# Altium PCB PCB1.PcbDoc (part 1 of 2)
Units mm, origin at the board's own origin, x right, y up, seen from the top; angles counter-clockwise.
Board outline 223.25 x 140.7 mm, 2 copper layers (Top Layer, Bottom Layer); 96 components, 172 nets, 687 pads, 133 vias.
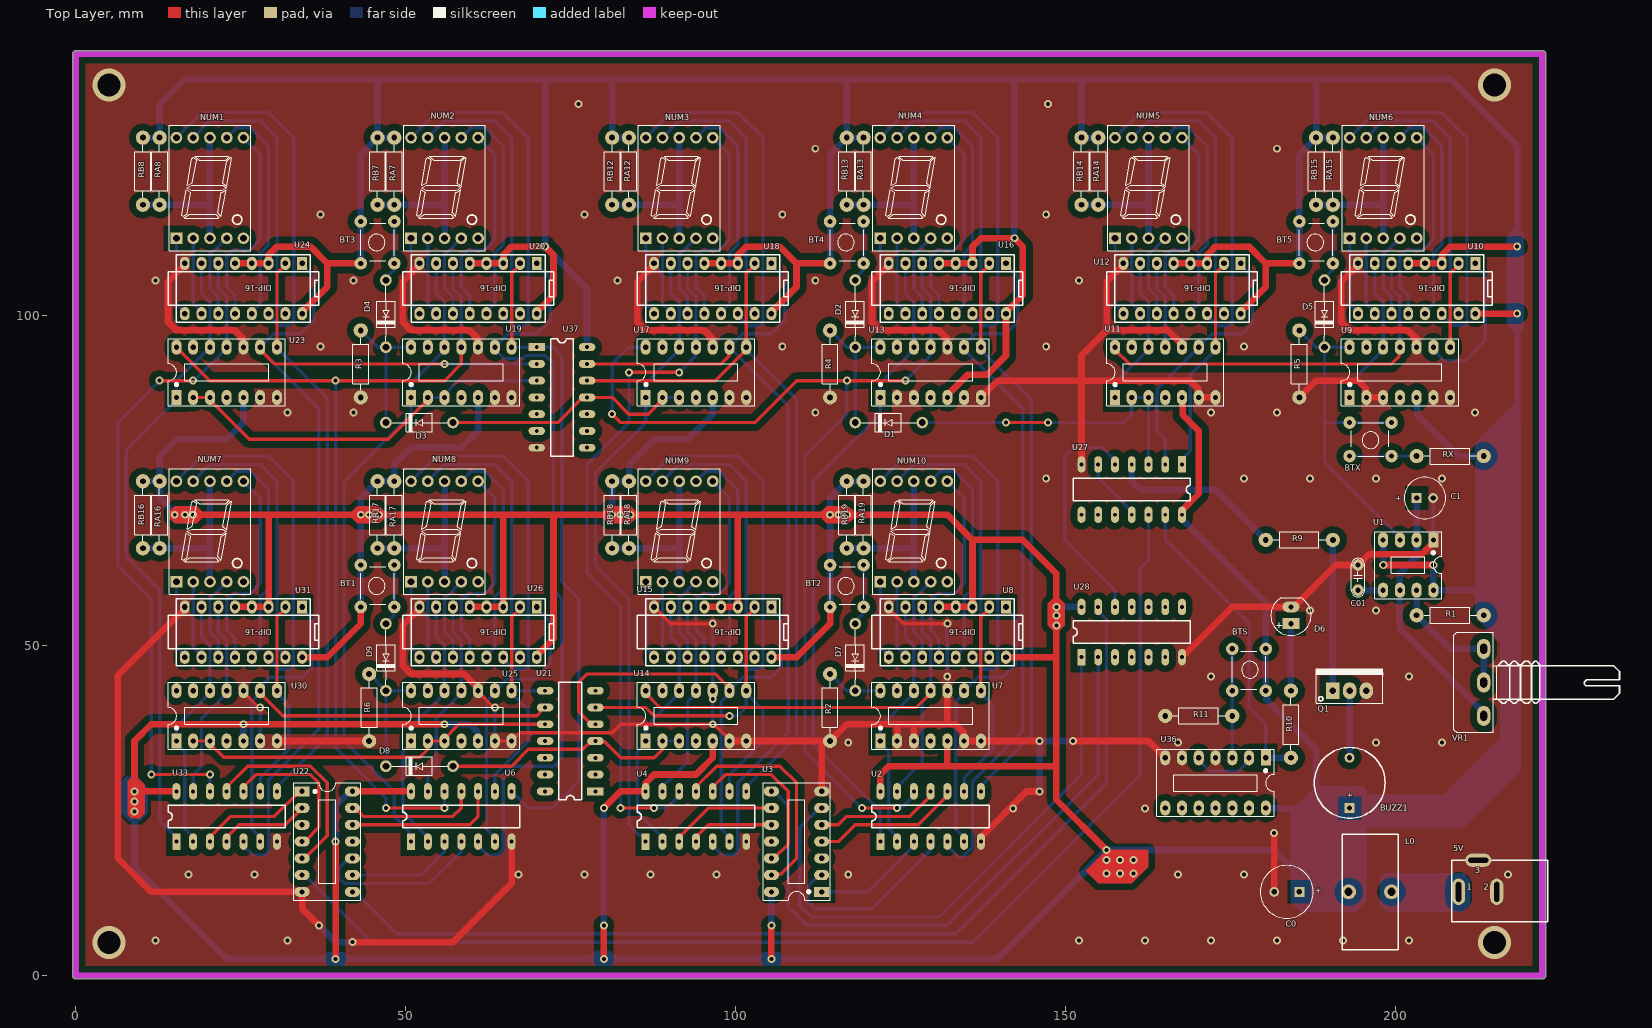
[diagram p0: Top Layer view]
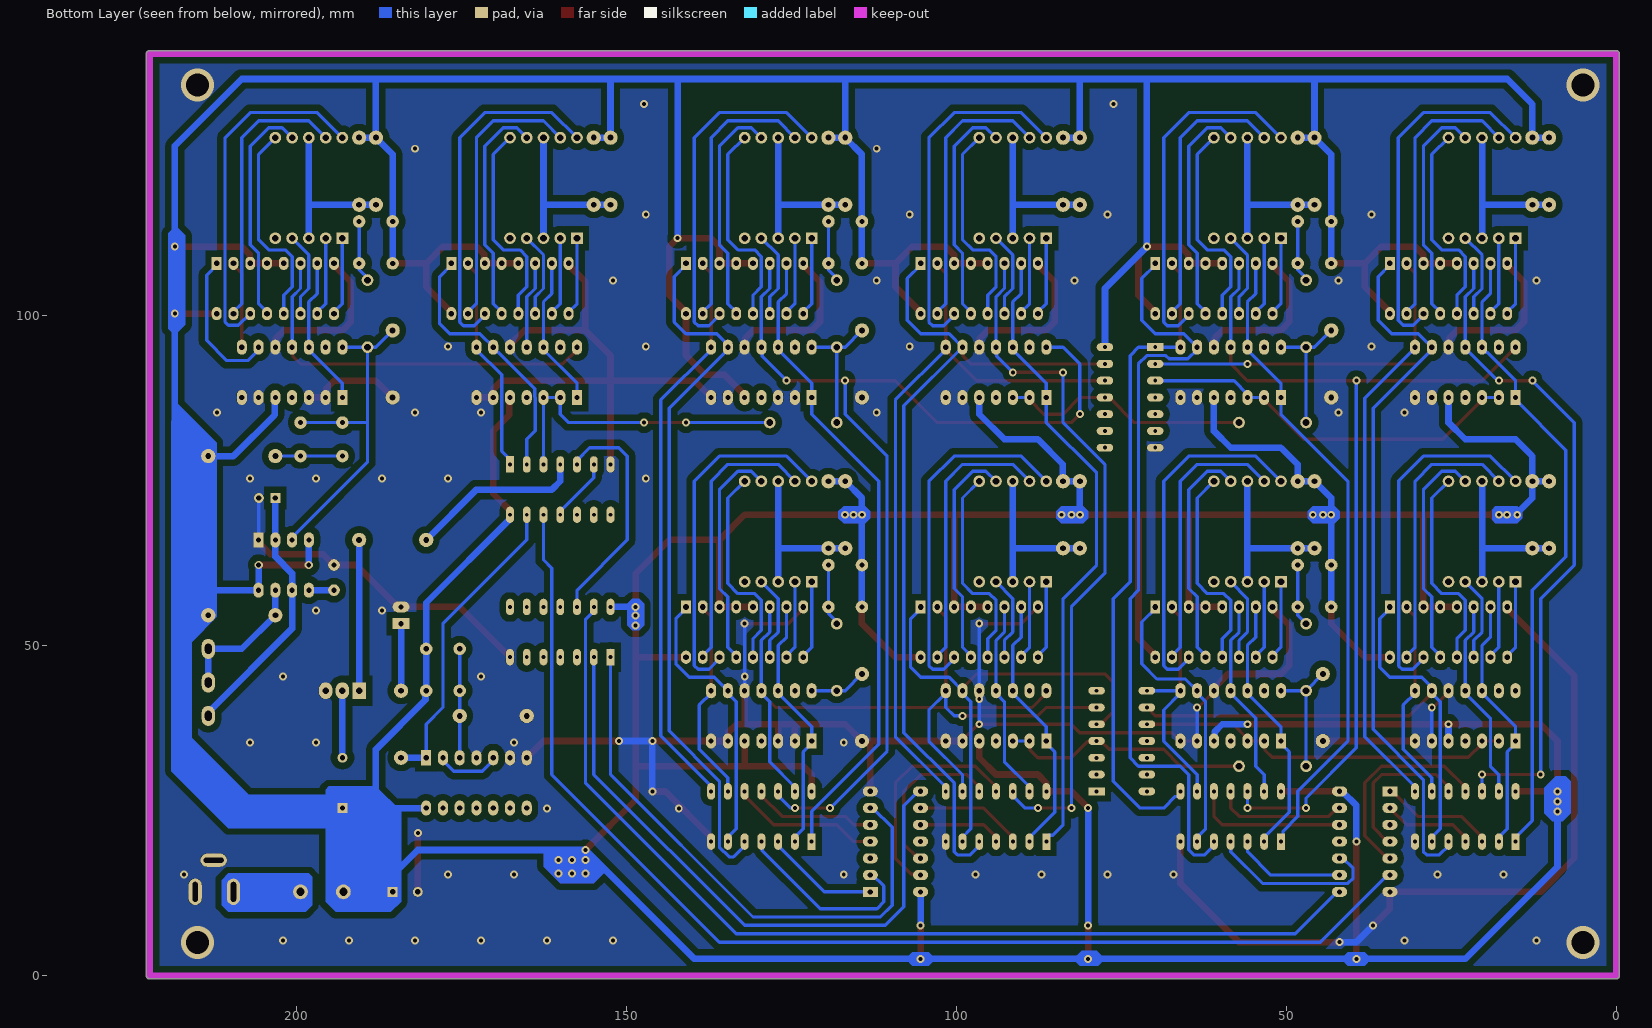
[diagram p1: Bottom Layer view, seen from below]
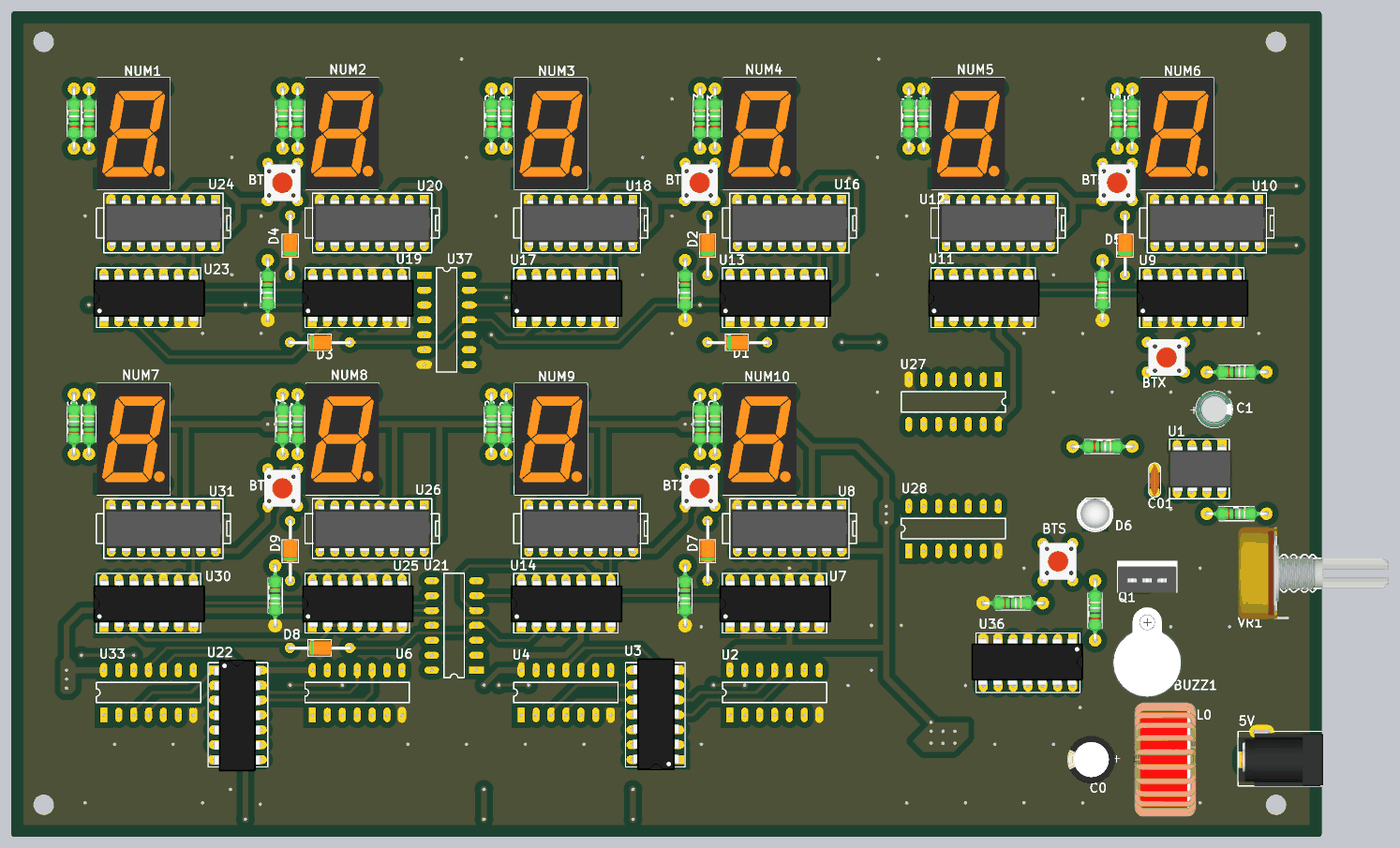
[diagram p3: 3D render of the assembled board from above, using the file's embedded part models]

## Layer stack, top to bottom
Top Solder: solder mask 0.0102, Solder Resist, Dk 3.5
Top Layer: signal copper 0.0356
Dielectric 1: dielectric 0.32, FR-4, Dk 4.8
Bottom Layer: signal copper 0.0356
Bottom Solder: solder mask 0.0102, Solder Resist, Dk 3.5

## Board outline
-0.5,0 -0.5,139.7 cw(c0,139.7) 0,140.2 222.25,140.2 cw(c222.25,139.7) 222.75,139.7 222.75,0 cw(c222.25,0) 222.25,-0.5 0,-0.5 cw(c0,0)

## Design rules (kind name [scope] priority, off if disabled: settings)
Clearance [All] p1: gap=0.2 ignorepadtopadclearanceinfootprint=FALSE except(1: Arc-Poly Arc-Region Track-Poly Track-Region SMDPad-Poly SMDPad-Region THPad-Poly THPad-Region Via-Poly Via-Region Fill-Poly Fill-Region Poly-Poly Poly-Region Region-Region)
HoleSize [All] p1: absolutevalues=TRUE maxlimit=6 minlimit=0.4 maxpercent=80.000 minpercent=20.000
MinimumSolderMaskSliver [All] p1: minsoldermaskwidth=0.1
PolygonConnect [All] p1: thpad.connectstyle=Relief thpad.reliefconductorwidth=0.5 thpad.reliefentries=4 thpad.polygonreliefangle="90 Angle" thpad.airgapwidth=0 smdpad.connectstyle=Relief smdpad.reliefconductorwidth=0.5 smdpad.reliefentries=4 smdpad.polygonreliefangle="90 Angle" smdpad.airgapwidth=0.5 via.connectstyle=Direct via.reliefconductorwidth=0.254 via.reliefentries=4 via.polygonreliefangle="90 Angle" via.airgapwidth=0.254
RoutingVias [All] p1: holewidth=0.6 width=1.2 viastyle="Through Hole" minholewidth=0.4 minwidth=0.8 maxholewidth=2 maxwidth=5
SilkToSolderMaskClearance [IsPad] p1: minsilkscreentomaskgap=0.03 clearancetoexposedcopper=TRUE
SolderMaskExpansion [All] p1: expansion=0.102 istentingtop=FALSE
Width [All] p1: maxlimit=1 minlimit=0.2 preferedwidth=0.5
27 further rules are at their usual default settings.

## Components (designator, comment, footprint, x,y, rotation, side; value= is the part's Value field where it differs from the comment)
5V "Jac DC" DC5 212.45,12.7 r180 top
BT1 "SW" SW2-DIP 43.18,55.88 r90 top value="Button chip 4 pin"
BT2 "SW" SW2-DIP 114.3,55.88 r90 top value="Button chip 4 pin"
BT3 "SW" SW2-DIP 43.18,107.95 r90 top value="Button chip 4 pin"
BT4 "SW" SW2-DIP 114.3,107.95 r90 top value="Button chip 4 pin"
BT5 "SW" SW2-DIP 185.42,107.95 r90 top value="Button chip 4 pin"
BTS "SW" SW2-DIP 180.34,49.53 r270 top value="Button chip 4 pin"
BTX "SW" SW2-DIP 199.39,78.74 r180 top value="Button chip 4 pin"
BUZZ1 "Speaker" SPEAKER 193.04,25.4 r90 top
C0 "100uF" CA-ALU-8 183.515,12.7 r180 top value=104
C1 "10uF" CA-ALU-6.3 204.45,72.39 r0 top value=104
C01 "104" CN1.5 194.31,60.452 r270 top value=33pF
D1 "Diode" DIO-1A 128.27,83.82 r180 top value=1N5007
D2 "Diode" DIO-1A 118.11,105.41 r270 top value=1N5007
D3 "Diode" DIO-1A 57.15,83.82 r180 top value=1N5007
D4 "Diode" DIO-1A 46.99,105.41 r270 top value=1N5007
D5 "Diode" DIO-1A 189.23,105.41 r270 top value=1N5007
D6 "LED" LED-5-RED 184.15,53.34 r90 top value="LED 3 ly Single Colour"
D7 "Diode" DIO-1A 118.11,53.34 r270 top value=1N5007
D8 "Diode" DIO-1A 57.15,31.75 r180 top value=1N5007
D9 "Diode" DIO-1A 46.99,53.34 r270 top value=1N5007
L0 "L-DIP-1" L-DIP-M-17.5x8.5 196.14,12.7 r180 top value="150 mH"
NUM1 "7SEG" LED7SEG-1-0.56 20.193,118.745 r0 top
NUM2 "7SEG" LED7SEG-1-0.56 55.753,118.745 r0 top
NUM3 "7SEG" LED7SEG-1-0.56 91.313,118.745 r0 top
NUM4 "7SEG" LED7SEG-1-0.56 126.873,118.745 r0 top
NUM5 "7SEG" LED7SEG-1-0.56 162.433,118.745 r0 top
NUM6 "7SEG" LED7SEG-1-0.56 197.993,118.745 r0 top
NUM7 "7SEG" LED7SEG-1-0.56 20.193,66.675 r0 top
NUM8 "7SEG" LED7SEG-1-0.56 55.753,66.675 r0 top
NUM9 "7SEG" LED7SEG-1-0.56 91.313,66.675 r0 top
NUM10 "7SEG" LED7SEG-1-0.56 126.873,66.675 r0 top
Q1 "TIP41C" TO220-123 190.5,43.18 r0 top
R1 "1K" RES-1/4W 207.899,54.737 r180 top
R2 "1K" RES-1/4W 114.427,41.021 r90 top
R3 "1K" RES-1/4W 43.307,93.091 r90 top
R4 "1K" RES-1/4W 114.427,93.091 r90 top
R5 "1K" RES-1/4W 185.547,93.091 r90 top
R6 "1K" RES-1/4W 44.577,41.021 r90 top
R9 "220" RES-1/4W 185.039,66.167 r180 top
R10 "220" RES-1/4W 184.023,37.719 r270 top
R11 "10K" RES-1/4W 169.799,39.497 r180 top
RA7 "470" RES-1/4W 48.133,121.539 r270 top
RA8 "470" RES-1/4W 12.573,121.539 r270 top
RA12 "470" RES-1/4W 83.693,121.539 r270 top
RA13 "470" RES-1/4W 119.253,121.539 r270 top
RA14 "470" RES-1/4W 154.813,121.539 r270 top
RA15 "470" RES-1/4W 190.373,121.539 r270 top
RA16 "470" RES-1/4W 12.573,69.469 r270 top
RA17 "470" RES-1/4W 48.133,69.469 r270 top
RA18 "470" RES-1/4W 83.693,69.469 r270 top
RA19 "470" RES-1/4W 119.253,69.469 r270 top
RB7 "470" RES-1/4W 45.593,121.539 r270 top
RB8 "470" RES-1/4W 10.033,121.539 r270 top
RB12 "470" RES-1/4W 81.153,121.539 r270 top
RB13 "470" RES-1/4W 116.713,121.539 r270 top
RB14 "470" RES-1/4W 152.273,121.539 r270 top
RB15 "470" RES-1/4W 187.833,121.539 r270 top
RB16 "470" RES-1/4W 10.033,69.469 r270 top
RB17 "470" RES-1/4W 45.593,69.469 r270 top
RB18 "470" RES-1/4W 81.153,69.469 r270 top
RB19 "470" RES-1/4W 116.713,69.469 r270 top
RX "1K" RES-1/4W 207.899,78.867 r180 top
U1 "NE555" DIP8 202.057,62.23 r180 top
U2 "4077" DIP14#1 121.92,20.32 r90 top
U3 "7421" DIP14#2 113.03,12.7 r90 top
U4 "4077" DIP14#1 86.36,20.32 r90 top
U6 "4077" DIP14#1 50.8,20.32 r90 top
U7 "7490" DIP14#2 121.92,35.56 r0 top
U8 "74LS247" DIP16 132.073,52.068 r180 top value=74LS238
U9 "7490" DIP14#2 193.04,87.63 r0 top
U10 "74LS247" DIP16 203.193,104.138 r180 top value=74LS238
U11 "7490" DIP14#2 157.48,87.63 r0 top
U12 "74LS247" DIP16 167.633,104.138 r180 top value=74LS238
U13 "7490" DIP14#2 121.92,87.63 r0 top
U14 "7490" DIP14#2 86.36,35.56 r0 top
U15 "74LS247" DIP16 96.513,52.068 r180 top value=74LS238
U16 "74LS247" DIP16 132.073,104.138 r180 top value=74LS238
U17 "7490" DIP14#2 86.36,87.63 r0 top
U18 "74LS247" DIP16 96.513,104.138 r180 top value=74LS238
U19 "7490" DIP14#2 50.8,87.63 r0 top
U20 "74LS247" DIP16 60.953,104.138 r180 top value=74LS238
U21 "4081" DIP14#1 78.74,27.94 r180 top
U22 "7421" DIP14#2 34.29,27.94 r270 top
U23 "7490" DIP14#2 15.24,87.63 r0 top
U24 "74LS247" DIP16 25.393,104.138 r180 top value=74LS238
U25 "7490" DIP14#2 50.8,35.56 r0 top
U26 "74LS247" DIP16 60.953,52.068 r180 top value=74LS238
U27 "4081" DIP14#1 167.64,77.47 r270 top
U28 "7411" DIP14#1 152.4,48.26 r90 top
U30 "7490" DIP14#2 15.24,35.56 r0 top
U31 "74LS247" DIP16 25.393,52.068 r180 top value=74LS238
U33 "4077" DIP14#1 15.24,20.32 r90 top
U36 "4013" DIP14#2 180.34,33.02 r180 top
U37 "4081" DIP14#1 69.85,95.25 r0 top
VR1 "50K" VR-S1 213.36,44.45 r90 top value="Volume 50k"

## Footprints (in the part's own frame and the unit in brackets; to place one, negate y for a bottom-side part, rotate by r counter-clockwise, add the part's x,y. Pads: shape width x height; smd on the part's side, far side on the other; paste and mask are expansions set on the pad)
CA-ALU-6.3 [mm] "Polarized capacitors, Aluminum Electrolytic Capacitors, 2-Leads, Body 6.3x15x2.5x0.5"
  rect 1.5x1.5 hole 0.8: 1(-1.25,0)
  round 1.5 hole 0.8: 2(1.25,0)
  silkscreen extent -3.15,-3.15 3.15,3.15, body extent -3.12,-3.15 3.17,3.15, height 11
CA-ALU-8 [mm] "Polarized capacitors, Aluminum Electrolytic Capacitors, 2-Leads, Body 8x16x3.5x0.5"
  rect 1.5x1.5 hole 0.8: 1(-1.905,0)
  round 1.5 hole 0.8: 2(1.905,0)
  silkscreen extent -4,-4 4,4, body extent -4.1,-4.1 4.1,4.1, height 14.4
CN1.5 [mil]
  round 70 hole 31: 1(-70,0) 2(80,0)
  silkscreen extent -110,-40 120,40, body extent -110,-33 120,33, height 235
DC5 [mm] "WR-DC_DC Power Jack_Right Angled_THT Center Pin ?2.0_Plug ID ?2.05_Plug OD ?5.5"
  oval 2x4 hole 0.8 slot 3 at 90 deg: 1(2.9,0) 2(-2.9,0)
  oval 4x2 hole 0.8 slot 3 at 0 deg: 3(-0.1,-4.8)
  silkscreen extent -10.6,-4.8 3.9,4.5, body extent -10.6,-4.9 3.9,4.5, height 10.7
DIO-1A [mil]
  round 70 hole 40: 1(0,0) 2(400,0)
  silkscreen extent 35,-55 365,55, body extent -11,-50 411,54, height 102
DIP8 [mil] "DIP, 8-Leads, Row Spacing 7.62mm, Pitch 2.54mm, Body 9.91x6.73mm"
  rect 60x90 hole 31: 1(-145,-150)
  oval 60x90 hole 31: 2(-45,-150) 3(55,-150) 4(155,-150) 5(155,150) 6(55,150) 7(-45,150) 8(-145,150)
  silkscreen extent -195,-200 205,200, body extent -213,-153 213,153, height 177
DIP14#1 [mm]
  rect 2.5x1.2 hole 0.6: 1(0,0)
  oval 2.5x1.2 hole 0.6: 2(0,-2.54) 3(0,-5.08) 4(0,-7.62) 5(0,-10.16) 6(0,-12.7) 7(0,-15.24) 8(7.62,-15.24) 9(7.62,-12.7) 10(7.62,-10.16) 11(7.62,-7.62) 12(7.62,-5.08) 13(7.62,-2.54) 14(7.62,0)
  silkscreen extent 2.08,-16.51 5.54,1.27, body extent 0.76,-16.51 6.86,1.27, height 2
DIP14#2 [mm] "DIP, 14-Leads, Row Spacing 7.62mm, Pitch 2.54mm, Body 19.2x6.6mm"
  rect 1.524x2.286 hole 0.787: 1(0,0)
  oval 1.524x2.286 hole 0.787: 2(2.54,0) 3(5.08,0) 4(7.62,0) 5(10.16,0) 6(12.7,0) 7(15.24,0) 8(15.24,7.62) 9(12.7,7.62) 10(10.16,7.62) 11(7.62,7.62) 12(5.08,7.62) 13(2.54,7.62) 14(0,7.62)
  silkscreen extent -1.28,-1.27 16.51,8.89, body extent -1.78,-0.32 17.27,7.68, height 3.7
DIP16 [mm]
  rect 1.5x2 hole 0.864: 1(-8.897,-3.812)
  oval 1.5x2 hole 0.864: 2(-6.357,-3.812) 3(-3.817,-3.812) 4(-1.277,-3.812) 5(1.263,-3.812) 6(3.803,-3.812) 7(6.343,-3.812) 8(8.883,-3.812) 9(8.883,3.808) 10(6.343,3.808) 11(3.803,3.808) 12(1.263,3.808) 13(-1.277,3.808) 14(-3.817,3.808) 15(-6.357,3.808) 16(-8.897,3.808)
  silkscreen extent -11.44,-5.08 11.42,5.08, body extent -10,-3.93 10,3.94, height 1.99
L-DIP-M-17.5x8.5 [mm] "Body 17.5x8.5mm, 2 leads"
  round 2.25 hole 1.25: 1(-3.25,0) 2(3.25,0)
  silkscreen extent -4.25,-8.75 4.25,8.75, body extent -5.27,-9.75 5.27,9.75, height 19.18
LED7SEG-1-0.56 [mil]
  rect 70x70 hole 40: 1(-195,-275)
  round 70 hole 40: 2(-95,-275) 3(5,-275) 4(105,-275) 5(205,-275) 6(205,325) 7(105,325) 8(5,325) 9(-95,325) 10(-195,325)
  silkscreen extent -239,-350 249,400, body extent -241,-349 251,399, height 315
LED-5-RED [mil] "LED 2 PIN, 5 ly , Only colour,pin to pin 100mil"
  rect 65x100 hole 32: 1(0,0)
  oval 65x100 hole 32: 2(100,0)
  silkscreen extent -70,-120 154,120, body extent -65,-119 149,118, height 339
RES-1/4W [mil]
  round 85 hole 35: 1(-215,5) 2(185,5)
  silkscreen extent -173,-42 141,52, body extent -227,-42 197,52, height 95
SPEAKER [mm]
  rect 1.5x1.5 hole 0.8: 1(0,0)
  round 1.5 hole 0.8: 2(7.62,0.013)
  silkscreen extent -1.55,-5.38 9.18,5.36, body extent -2.22,-6 13.24,6, height 4.5
SW2-DIP [mil] "SW button 4pin, 250 x250 mil"
  round 75 hole 31: 1(0,0) 2(0,-200) 3(250,-200) 4(250,0)
  silkscreen extent 15,-215 240,0, body extent -36,-220 276,24, height 276
TO220-123 [mil] "TO-220 - 1-2-3"
  rect 80x100 hole 39: 1(0,0)
  oval 80x100 hole 39: 2(100,0) 3(200,0)
  silkscreen extent -100,-76 300,130, body extent -95,-80 295,97, height 323
VR-S1 [mil]
  oval 120x78.74 hole 40 slot 60 at 0 deg: 1(-200,0) 2(-1,0) 3(200,0)
  silkscreen extent -299,-810 300,179, body extent -310,-818 310,188, height 839

## Part data
5V: library part DCIN, "Jac DC input"
BT1 BT2 BT3 BT4 BT5 BTS BTX: library part SW4, "Switch button 4 pin"
BUZZ1: "Loudspeaker", LatestRevisionDate=17-Jul-2002, LatestRevisionNote="Re-released for DXP Platform.", PackageReference=PIN2, Published=24-Mar-1999, Publisher="Altium Limited"
C0 C1: library part CN-ALU-DIP, "Capacitor (Semiconductor SIM Model)", LatestRevisionDate=17-Jul-2002, LatestRevisionNote="Re-released for DXP Platform.", PackageReference=C1206, Publisher="Altium Limited"
C01: library part CN
D1 D2 D3 D4 D5 D7 D8 D9: "Default Diode", Code - JEDEC=DO-214-AB, Published=8-Jun-2000, Publisher="Altium Limited", Revision="July-2002: Re-released for DXP Platform."
D6: "LED Single colour Green and Red"
L0: "Inductor"
NUM1 NUM2 NUM3 NUM4 NUM5 NUM6 NUM7 NUM8 NUM9 NUM10: library part LED7SEG-1, "14.2 mm General Purpose Blue 7-Segment Display: CC, RH DP, Gray Surface", Colour=Blue, PackageDocument=24-Sep-2002, ComponentLink1Description="Manufacturer Link", ComponentLink1URL=http://www.agilent.com/, DatasheetDocument=24-Sep-2002, LatestRevisionDate=17-Dec-2003, LatestRevisionNote="Schematic revised, PCB Footprint replaced.", MinimumIntensity="2020 ucd", Note="IF = 10 mA", PackageReference=H, Published=8-Jun-2000, Publisher="Altium Limited"
Q1: "NPN 2W, BCE"
R1 R2 R3 R4 R5 R6 R9 R10 R11 RA7 RA8 RA12 RA13 RA14 RA15 RA16 RA17 RA18 RA19 RB7 RB8 RB12 RB13 RB14 RB15 RB16 RB17 RB18 RB19 RX: library part Res, "Res", Manufacturer="Generic Components", Class=Passive, Published=08/06/2000, Publisher="Altium Hobart Technology Centre", SubClass=R
U1: "TIMER IC", Current=200mA, Frequency=500kHz, Manufacturer=STMicroelectronics, Manufacturer Part Number=NE555DT, Operating Temperature="0°C ~ 70°C", Package / Case="8-SOIC (3.9mm Width)", Supplier Part Number=497-1962-2-ND, Voltage - Supply="4.5 V ~ 16 V", Category="Integrated Circuits (ICs)", Count=-, Packaging="Tape & Reel (TR)", RoHS="RoHS Compliant", Supplier=Digi-Key, Supplier 1=Digi-Key, Supplier Part Number 1=497-1962-2-ND, Type="555 Type, Timer/Oscillator (Single)"
U7 U9 U11 U13 U14 U17 U19 U23 U25 U30: "4-Bit Decade Counter"
U8 U10 U12 U15 U16 U18 U20 U24 U26 U31: library part 74247, Copyright by=VanDungEvn@Gmail.com
U36: "Dual D-Type Flip-Flop", Creat by=VanDungEvn@Gmail.com
VR1: library part VR-S, "Var Resistor"

## Via types
v1: diameter 1.2, hole 0.6, Top Layer to Bottom Layer, tented both sides, 127 vias
v2: diameter 5, hole 3.5, Top Layer to Bottom Layer, 4 vias
v3: diameter 1.27, hole 0.711, Top Layer to Bottom Layer, tented both sides, 2 vias

## Nets (pads, with @x,y where several pads share a name; then routed paths per layer and width w, separated by ;. In a path a pad name is that pad's centre, name@x,y a point inside that pad or via, vN(x,y) a via of type N, cw(c..) or ccw(c..) an arc to the next point about the centre after c; other vN are vias at no path point)
A7: D7.2 R2.2 U7.14 | length 8.7
  Bottom Layer w0.5: R2.2@114.3,45.72 116.84,43.18 D7.2@118.11,43.18 U7.14@121.92,43.18
A9: BTX.2 BTX.3 D5.2 R5.2 U1.3 U9.14 | length 52.8
  Bottom Layer w0.5: R5.2@185.42,97.79 187.96,95.25 D5.2@189.23,95.25 ; U9.14@193.04,95.25 D5.2@189.23,95.25 ; BTX.2@199.39,83.82 189.23,83.82 ; U1.3@200.66,66.04 200.66,66.421 189.23,77.851 189.23,83.82 ; 189.23,83.82 D5.2@189.23,95.25
A11: U9.11 U10.6 U11.14 | length 59.5
  Top Layer w0.5: U11.14@157.48,95.25 157.48,94.869 159.639,92.71 199.39,92.71 200.535,93.855 200.535,95.125 U9.11@200.66,95.25
  Bottom Layer w0.5: U10.6@199.39,107.95 199.39,104.14 200.66,102.87 U9.11@200.66,95.25
A13: D1.2 D2.2 R4.2 U13.14 | length 20.1
  Bottom Layer w0.5: R4.2@114.3,97.79 116.84,95.25 D2.2@118.11,95.25 ; D1.2@118.11,83.82 D2.2@118.11,95.25 ; U13.14@121.92,95.25 D2.2@118.11,95.25
A14: U2.13 U7.11 U8.6 U14.14 | length 76.3
  Top Layer w0.5: U14.14@86.36,43.18 86.36,42.799 88.519,40.64 127.381,40.64 129.54,42.799 U7.11@129.54,43.18
  Bottom Layer w0.5: U2.13@124.46,27.94 124.46,28.59 128.27,32.4 128.27,41.529 129.54,42.799 U7.11@129.54,43.18 129.54,50.8 128.27,52.07 U8.6@128.27,55.88
A17: U2.12 U13.11 U16.6 U17.14 | length 161.5
  Top Layer w0.5: v1(81.28,85.09) 82.55,83.82 102.87,83.82 109.22,90.17 v1(116.84,90.17) v1(125.73,90.17) ; v1(119.126,25.4) v1(124.46,25.4)
  Bottom Layer w0.5: v1(81.28,85.09) 81.28,92.71 83.82,95.25 U17.14@86.36,95.25 ; v1(116.84,90.17) 116.84,85.09 110.49,78.74 110.49,34.036 v1(119.126,25.4) ; v1(124.46,25.4) 125.11,25.4 127,27.29 U2.12@127,27.94 ; v1(125.73,90.17) 129.415,93.855 129.415,95.125 U13.11@129.54,95.25 129.54,102.87 128.27,104.14 U16.6@128.27,107.95
A19: D3.2 D4.2 R3.2 U19.14 | length 20.1
  Bottom Layer w0.5: R3.2@43.18,97.79 45.72,95.25 D4.2@46.99,95.25 ; D3.2@46.99,83.82 D4.2@46.99,95.25 ; U19.14@50.8,95.25 D4.2@46.99,95.25
A23: U6.12 U19.11 U20.6 U23.14 | length 141.5
  Top Layer w0.5: U23.14@15.24,95.25 15.24,95.146 15.896,94.49 16,94.49 20.32,90.17 v1(39.37,90.17) 55.88,90.17 58.42,92.71 U19.11@58.42,95.25 ; v1(46.99,25.4) v1(55.88,25.4)
  Bottom Layer w0.5: v1(39.37,90.17) 39.37,34.544 46.99,26.924 v1(46.99,25.4) ; v1(55.88,25.4) U6.12@55.88,27.94 ; U20.6@57.15,107.95 57.15,104.14 58.42,102.87 U19.11@58.42,95.25
A25: D8.2 D9.2 R6.2 U25.14 | length 18.8
  Bottom Layer w0.5: R6.2@44.45,45.72 D9.2@46.99,43.18 ; D8.2@46.99,31.75 D9.2@46.99,43.18 ; U25.14@50.8,43.18 D9.2@46.99,43.18
A30: U30.14
B7: U2.2 U7.1 U7.12 U8.7 | length 39.2
  Bottom Layer w0.5: U2.2@124.46,20.32 124.46,20.97 123.19,22.24 123.19,33.909 121.92,35.179 U7.1@121.92,35.56 121.92,37.719 127,42.799 U7.12@127,43.18 127,50.038 125.73,51.308 U8.7@125.73,55.88
B9: U9.1 U9.12 U10.7 | length 23
  Bottom Layer w0.5: U9.1@193.04,87.63 193.04,89.789 198.12,94.869 U9.12@198.12,95.25 198.12,102.108 196.85,103.378 U10.7@196.85,107.95
B11: U11.1 U11.12 U12.7 | length 23
  Bottom Layer w0.5: U11.1@157.48,87.63 157.48,89.789 162.56,94.869 U11.12@162.56,95.25 162.56,102.108 161.29,103.378 U12.7@161.29,107.95
B13: U2.1 U13.1 U13.12 U16.7 | length 98.7
  Bottom Layer w0.5: U2.1@121.92,20.32 121.92,24.892 111.76,35.052 111.76,74.93 121.92,85.09 U13.1@121.92,87.63 121.92,89.789 127,94.869 U13.12@127,95.25 127,102.108 125.73,103.378 U16.7@125.73,107.95
B14: U4.2 U14.1 U14.12 U15.7 | length 40.3
  Bottom Layer w0.5: U4.2@88.9,20.32 88.9,20.97 85.09,24.78 85.09,33.909 86.36,35.179 U14.1@86.36,35.56 86.36,37.719 91.44,42.799 U14.12@91.44,43.18 91.44,50.038 90.17,51.308 U15.7@90.17,55.88
B17: U4.1 U17.1 U17.12 U18.7 | length 96.9
  Bottom Layer w0.5: U4.1@86.36,20.32 86.36,20.925 86.01,21.275 85.405,21.275 83.82,22.86 83.82,57.15 78.74,62.23 78.74,76.2 86.36,83.82 U17.1@86.36,87.63 86.36,89.789 91.44,94.869 U17.12@91.44,95.25 91.44,102.108 90.17,103.378 U18.7@90.17,107.95
B19: U6.1 U19.1 U19.12 U20.7 | length 98.7
  Bottom Layer w0.5: U6.1@50.8,20.32 50.48,20.64 50.48,21.91 48.26,24.13 48.26,27.94 40.64,35.56 40.64,74.93 50.8,85.09 U19.1@50.8,87.63 50.8,89.789 55.88,94.869 U19.12@55.88,95.25 55.88,102.108 54.61,103.378 U20.7@54.61,107.95
B23: U23.1 U23.12 U24.7 U33.1 | length 96.6
  Bottom Layer w0.5: U33.1@15.24,20.32 15.24,20.97 12.7,23.51 12.7,58.42 7.62,63.5 7.62,79.629 15.24,87.249 U23.1@15.24,87.63 15.24,90.17 19.56,94.49 19.664,94.49 20.32,95.146 U23.12@20.32,95.25 20.32,102.108 19.05,103.378 U24.7@19.05,107.95
B25: U6.2 U25.1 U25.12 U26.7 | length 40.3
  Bottom Layer w0.5: U6.2@53.34,20.32 53.34,20.97 49.53,24.78 49.53,33.909 50.8,35.179 U25.1@50.8,35.56 50.8,37.719 55.88,42.799 U25.12@55.88,43.18 55.88,50.038 54.61,51.308 U26.7@54.61,55.88
B30: U30.1 U30.12 U31.7 U33.2 | length 39.2
  Bottom Layer w0.5: U33.2@17.78,20.32 17.78,20.97 16.51,22.24 16.51,33.909 15.24,35.179 U30.1@15.24,35.56 15.24,37.719 20.32,42.799 U30.12@20.32,43.18 20.32,50.038 19.05,51.308 U31.7@19.05,55.88
GND: 5V.2 5V.3 C0.2 C01.1 C1.2 D6.2 Q1.3 R2.1 R3.1 R4.1 R5.1 R6.1 R11.2 U1.1 U2.7 U3.7 U4.7 U6.7 U7.2 U7.3 U7.6 U7.7 U7.10 U8.8 U9.2 U9.3 U9.6 U9.7 U9.10 U10.8 U11.6 U11.7 U11.10 U12.8 U13.2 U13.3 U13.6 U13.7 U13.10 U14.6 U14.7 U14.10 U15.8 U16.8 U17.6 U17.7 U17.10 U18.8 U19.6 U19.7 U19.10 U20.8 U22.7 U23.6 U23.7 U23.10 U24.8 U25.6 U25.7 U25.10 U26.8 U27.7 U28.7 U30.6 U30.7 U30.10 U31.8 U33.7 U36.4 U36.6 U36.7 U37.7 | length 644.3
  Top Layer w0.5: U30.10@25.4,43.18 25.4,42.991 27.751,40.64 v1(27.94,40.64) ; U25.10@60.96,43.18 60.96,42.991 63.311,40.64 v1(63.5,40.64) ; U25.6@63.5,35.56 U25.7@66.04,35.56 66.04,35.664 66.513,36.137 66.617,36.137 67.31,36.83 81.28,36.83 82.55,38.1 v1(96.52,38.1) 96.709,38.1 99.06,35.749 U14.6@99.06,35.56 ; U15.8@87.63,55.88 90.17,53.34 v1(96.52,53.34) ; v1(96.52,41.91) U14.10@96.52,43.18 ; U8.8@123.19,55.88 123.19,55.63 125.48,53.34 v1(132.08,53.34)
  Top Layer w1: U31.8@16.51,55.88 16.51,55.63 6.35,45.47 6.35,17.78 11.43,12.7 U22.7@34.29,12.7 34.29,10.16 v1(36.83,7.62) ; U24.8@16.51,107.95 16.51,107.7 13.97,105.16 13.97,99.06 15.24,97.79 24.13,97.79 25.3,96.62 25.3,95.35 U23.10@25.4,95.25 ; U30.7@30.48,35.56 R6.1@44.45,35.56 ; v1(41.91,5.08) 57.15,5.08 66.04,13.97 U6.7@66.04,20.32 ; U26.8@52.07,55.88 52.07,55.63 49.53,53.09 49.53,46.99 50.8,45.72 58.801,45.72 60.96,43.561 U25.10@60.96,43.18 ; U20.8@52.07,107.95 52.07,107.7 49.53,105.16 49.53,99.06 50.8,97.79 59.69,97.79 60.86,96.62 60.86,95.35 U19.10@60.96,95.25 ; U18.8@87.63,107.95 87.63,107.7 85.09,105.16 85.09,99.06 86.36,97.79 95.25,97.79 96.42,96.62 96.42,95.35 U17.10@96.52,95.25 ; U14.6@99.06,35.56 U14.7@101.6,35.56 113.03,35.56 ; U3.7@113.03,27.94 113.03,35.56 ; U16.8@123.19,107.95 123.19,107.7 120.65,105.16 120.65,99.06 121.92,97.79 130.81,97.79 131.98,96.62 131.98,95.35 U13.10@132.08,95.25 ; U7.2@124.46,35.56 124.46,38.1 ; U7.3@127,35.56 127,38.1 ; U7.10@132.08,43.18 132.08,38.1 ; U2.7@137.16,20.32 137.16,20.97 144.092,27.902 146.012,27.902 v1(146.05,27.94) ; U13.7@137.16,87.63 137.16,87.869 137.402,88.111 137.641,88.111 139.7,90.17 152.4,90.17 ; v1(146.05,35.56) U7.7@137.16,35.56 U7.6@134.62,35.56 134.52,35.66 134.52,36.93 133.35,38.1 132.08,38.1 ; v1(151.13,35.56) 162.56,35.56 164.619,33.501 164.858,33.501 165.1,33.259 U36.7@165.1,33.02 ; U27.7@152.4,77.47 152.4,90.17 ; U12.8@158.75,107.95 158.75,107.7 156.21,105.16 156.21,97.79 ; U28.7@167.64,48.26 167.64,48.856 167.732,48.948 168.328,48.948 175.26,55.88 D6.2@184.15,55.88 184.594,55.88 190.945,62.23 194.373,62.23 196.031,63.888 203.969,63.888 205.74,65.659 U1.1@205.74,66.04 ; U11.10@167.64,95.25 167.64,95.631 165.481,97.79 156.21,97.79 ; U11.7@172.72,87.63 U11.6@170.18,87.63 170.08,87.73 170.08,89 168.91,90.17 152.4,90.17 ; C0.2@181.61,12.7 v1(181.61,21.59) ; R5.1@185.42,87.63 187.96,90.17 194.31,90.17 195.48,89 195.48,87.73 U9.2@195.58,87.63 U9.3@198.12,87.63 ; U10.8@194.31,107.95 194.31,107.7 191.77,105.16 191.77,99.06 193.04,97.79 201.93,97.79 203.1,96.62 203.1,95.35 U9.10@203.2,95.25 ; 113.03,35.56 R2.1@114.3,35.56 116.84,38.1 124.46,38.1 ; 124.46,38.1 127,38.1 ; 127,38.1 132.08,38.1 ; 152.4,90.17 152.4,93.98 156.21,97.79
  Bottom Layer w0.5: U30.6@27.94,35.56 v1(27.94,40.64) ; U25.6@63.5,35.56 v1(63.5,40.64) ; v1(96.52,38.1) v1(96.52,41.91) ; U14.10@96.52,43.18 v1(96.52,53.34) ; U7.10@132.08,43.18 v1(132.08,53.34) ; C1.2@205.7,72.39 205.7,66.08 U1.1@205.74,66.04
  Bottom Layer w1: v1(36.83,7.62) 39.37,5.08 v1(41.91,5.08) ; v1(146.05,27.94) v1(146.05,35.56) v1(151.13,35.56)
  other v1: 12.06,5.324 32.06,5.324 152.06,5.324 162.06,5.324 172.06,5.324 182.06,5.324 192.06,5.324 202.06,5.324 17.06,15.324 27.06,15.324 67.06,15.324 77.06,15.324 87.06,15.324 97.06,15.324 117.06,15.324 167.06,15.324 177.06,15.324 217.06,15.324 142.06,25.324 162.06,25.324 117.06,35.324 167.06,35.324 197.06,35.324 207.06,35.324 132.06,45.324 172.06,45.324 202.06,45.324 187.06,55.324 197.06,55.324 147.06,75.324 177.06,75.324 187.06,75.324 197.06,75.324 207.06,75.324 32.06,85.324 42.06,85.324 112.06,85.324 172.06,85.324 182.06,85.324 212.06,85.324 37.06,95.324 107.06,95.324 147.06,95.324 177.06,95.324 12.06,105.324 42.06,105.324 82.06,105.324 112.06,105.324 152.06,105.324 37.06,115.324 77.06,115.324 107.06,115.324 147.06,115.324 112.06,125.324 182.06,125.324 76.2,132.08 147.32,132.08
  other v2: 5,5 215,5 5,135 215,135
Net5V_1: 5V.1 L0.1 | length 10.2
  Bottom Layer w1: L0.1@199.39,12.7 5V.1@209.55,12.7
NetBT1_2: BT1.2 BT1.3 D9.1 | length 9.4
  Bottom Layer w0.5: D9.1@46.99,53.34 48.26,54.61 BT1.2@48.26,55.88 BT1.3@48.26,62.23
NetBT2_2: BT2.2 BT2.3 D7.1 | length 9.4
  Bottom Layer w0.5: D7.1@118.11,53.34 118.11,53.656 119.38,54.926 BT2.2@119.38,55.88 BT2.3@119.38,62.23
NetBT3_2: BT3.2 BT3.3 D4.1 | length 9.4
  Bottom Layer w0.5: D4.1@46.99,105.41 46.99,105.726 48.26,106.996 BT3.2@48.26,107.95 BT3.3@48.26,114.3
NetBT4_2: BT4.2 BT4.3 D2.1 | length 9.4
  Bottom Layer w0.5: D2.1@118.11,105.41 118.11,105.726 119.38,106.996 BT4.2@119.38,107.95 BT4.3@119.38,114.3
NetBT5_2: BT5.2 BT5.3 D5.1 | length 9.4
  Bottom Layer w0.5: D5.1@189.23,105.41 189.23,105.726 190.5,106.996 BT5.2@190.5,107.95 BT5.3@190.5,114.3
NetBTS_2: BTS.2 BTS.3 R11.1 U36.3 | length 16.5
  Bottom Layer w0.5: U36.3@175.26,33.02 R11.1@175.26,39.37 BTS.3@175.26,43.18 BTS.2@175.26,49.53
NetBTX_1: BTX.1 BTX.4 RX.2 | length 10.2
  Bottom Layer w0.5: BTX.4@193.04,78.74 BTX.1@199.39,78.74 RX.2@203.2,78.74
NetBUZZ1_2: BUZZ1.2 Q1.2 | length 10.2
  Bottom Layer w1: BUZZ1.2@193.027,33.02 193.034,33.026 193.034,43.174 Q1.2@193.04,43.18
NetC1_1: C1.1 U1.2 U1.6 VR1.1 | length 39.3
  Bottom Layer w1: C1.1@203.2,72.39 203.2,63.5 200.66,60.96 200.66,52.594 213.36,39.894 VR1.1@213.36,39.37
NetC01_2: C01.2 U1.5 | length 3.8
  Bottom Layer w1: C01.2@194.31,58.42 U1.5@198.12,58.42
NetD1_1: D1.1 U11.2 U11.3 U27.3 | length 47.8
  Top Layer w0.5: v1(140.97,83.82) v1(147.32,83.82)
  Bottom Layer w0.5: D1.1@128.27,83.82 v1(140.97,83.82) ; v1(147.32,83.82) 158.75,83.82 160.02,85.09 U11.2@160.02,87.63 U11.3@162.56,87.63 162.56,78.74 162.87,78.43 162.56,78.12 U27.3@162.56,77.47
NetD3_1: D3.1 U17.2 U17.3 U37.11 | length 38.2
  Top Layer w0.5: D3.1@57.15,83.82 73.01,83.82 76.82,87.63 U37.11@77.47,87.63 81.28,87.63 83.82,85.09 86.741,85.09 88.9,87.249 U17.2@88.9,87.63
  Bottom Layer w0.5: U17.2@88.9,87.63 U17.3@91.44,87.63
NetD6_1: D6.1 R10.1 | length 10.2
  Bottom Layer w1: R10.1@184.15,43.18 D6.1@184.15,53.34
NetD8_1: D8.1 U14.2 U14.3 U21.4 | length 38.7
  Top Layer w0.5: D8.1@57.15,31.75 66.04,31.75 68.58,34.29 76.82,34.29 78.09,35.56 U21.4@78.74,35.56 78.874,35.426 80.144,35.426 82.55,33.02 87.63,33.02 88.775,34.165 88.775,35.435 U14.2@88.9,35.56
  Bottom Layer w0.5: U14.2@88.9,35.56 U14.3@91.44,35.56
NetNUM1_1: NUM1.1 U24.9 | length 12
  Bottom Layer w0.5: NUM1.1@15.24,111.76 15.24,101.85 16.51,100.58 U24.9@16.51,100.33
NetNUM1_2: NUM1.2 U24.10 | length 12
  Bottom Layer w0.5: NUM1.2@17.78,111.76 17.78,101.85 19.05,100.58 U24.10@19.05,100.33
NetNUM1_3: NUM1.3 NUM1.8 RA8.2 RB8.2 | length 25.4
  Bottom Layer w1: RB8.2@10.16,116.84 RA8.2@12.7,116.84 20.32,116.84 ; NUM1.3@20.32,111.76 20.32,116.84 ; NUM1.8@20.32,127 20.32,116.84
NetNUM1_4: NUM1.4 U24.11 | length 13
  Bottom Layer w0.5: U24.11@21.59,100.33 21.59,102.87 20.32,104.14 20.32,109.22 NUM1.4@22.86,111.76
NetNUM1_6: NUM1.6 U24.12 | length 31.8
  Bottom Layer w0.5: U24.12@24.13,100.33 24.13,103.124 22.86,104.394 22.86,108.966 23.876,109.982 26.416,109.982 27.94,111.506 27.94,124.46 NUM1.6@25.4,127
NetNUM1_7: NUM1.7 U24.13 | length 34.6
  Bottom Layer w0.5: NUM1.7@22.86,127 24.384,128.524 26.416,128.524 29.21,125.73 29.21,110.744 27.94,109.474 27.94,101.85 26.67,100.58 U24.13@26.67,100.33
NetNUM1_9: NUM1.9 U24.15 | length 42
  Bottom Layer w0.5: NUM1.9@17.78,127 20.32,129.54 27.94,129.54 30.48,127 30.48,101.85 31.75,100.58 U24.15@31.75,100.33
NetNUM1_10: NUM1.10 U24.14 | length 53.6
  Bottom Layer w0.5: NUM1.10@15.24,127 19.05,130.81 29.21,130.81 33.02,127 33.02,99.314 32.258,98.552 30.738,98.552 29.21,100.08 U24.14@29.21,100.33
NetNUM2_1: NUM2.1 U20.9 | length 12
  Bottom Layer w0.5: NUM2.1@50.8,111.76 50.8,101.85 52.07,100.58 U20.9@52.07,100.33
NetNUM2_2: NUM2.2 U20.10 | length 12
  Bottom Layer w0.5: NUM2.2@53.34,111.76 53.34,101.85 54.61,100.58 U20.10@54.61,100.33
NetNUM2_3: NUM2.3 NUM2.8 RA7.2 RB7.2 | length 50.8
  Bottom Layer w1: RA7.2@48.26,116.84 RB7.2@45.72,116.84 RA7.2@48.26,116.84 ; RA7.2@48.26,116.84 55.88,116.84 ; RA7.2@48.26,116.84 55.88,116.84 ; 55.88,116.84 NUM2.3@55.88,111.76 55.88,116.84 ; 55.88,116.84 NUM2.8@55.88,127 55.88,116.84
NetNUM2_4: NUM2.4 U20.11 | length 13
  Bottom Layer w0.5: U20.11@57.15,100.33 57.15,102.87 55.88,104.14 55.88,109.22 NUM2.4@58.42,111.76
NetNUM2_6: NUM2.6 U20.12 | length 31.8
  Bottom Layer w0.5: U20.12@59.69,100.33 59.69,103.124 58.42,104.394 58.42,108.966 59.436,109.982 61.976,109.982 63.5,111.506 63.5,124.46 NUM2.6@60.96,127
NetNUM2_7: NUM2.7 U20.13 | length 34.6
  Bottom Layer w0.5: NUM2.7@58.42,127 59.944,128.524 61.976,128.524 64.77,125.73 64.77,110.744 63.5,109.474 63.5,101.85 62.23,100.58 U20.13@62.23,100.33
NetNUM2_9: NUM2.9 U20.15 | length 42
  Bottom Layer w0.5: NUM2.9@53.34,127 55.88,129.54 63.5,129.54 66.04,127 66.04,101.85 67.31,100.58 U20.15@67.31,100.33
NetNUM2_10: NUM2.10 U20.14 | length 53.8
  Bottom Layer w0.5: NUM2.10@50.8,127 54.61,130.81 64.77,130.81 68.58,127 68.58,99.06 68.01,98.49 66.36,98.49 64.77,100.08 U20.14@64.77,100.33
NetNUM3_1: NUM3.1 U18.9 | length 12
  Bottom Layer w0.5: NUM3.1@86.36,111.76 86.36,101.85 87.63,100.58 U18.9@87.63,100.33
NetNUM3_2: NUM3.2 U18.10 | length 12
  Bottom Layer w0.5: NUM3.2@88.9,111.76 88.9,101.85 90.17,100.58 U18.10@90.17,100.33
NetNUM3_3: NUM3.3 NUM3.8 RA12.2 RB12.2 | length 25.4
  Bottom Layer w1: RB12.2@81.28,116.84 RA12.2@83.82,116.84 91.44,116.84 ; NUM3.3@91.44,111.76 91.44,116.84 ; NUM3.8@91.44,127 91.44,116.84
NetNUM3_4: NUM3.4 U18.11 | length 13
  Bottom Layer w0.5: U18.11@92.71,100.33 92.71,102.87 91.44,104.14 91.44,109.22 NUM3.4@93.98,111.76
NetNUM3_6: NUM3.6 U18.12 | length 31.8
  Bottom Layer w0.5: U18.12@95.25,100.33 95.25,103.124 93.98,104.394 93.98,108.966 94.996,109.982 97.536,109.982 99.06,111.506 99.06,124.46 NUM3.6@96.52,127
NetNUM3_7: NUM3.7 U18.13 | length 34.6
  Bottom Layer w0.5: NUM3.7@93.98,127 95.504,128.524 97.536,128.524 100.33,125.73 100.33,110.744 99.06,109.474 99.06,101.85 97.79,100.58 U18.13@97.79,100.33
NetNUM3_9: NUM3.9 U18.15 | length 42
  Bottom Layer w0.5: NUM3.9@88.9,127 91.44,129.54 99.06,129.54 101.6,127 101.6,101.85 102.87,100.58 U18.15@102.87,100.33
NetNUM3_10: NUM3.10 U18.14 | length 53.8
  Bottom Layer w0.5: NUM3.10@86.36,127 90.17,130.81 100.33,130.81 104.14,127 104.14,99.06 103.57,98.49 101.92,98.49 100.33,100.08 U18.14@100.33,100.33
NetNUM4_1: NUM4.1 U16.9 | length 12
  Bottom Layer w0.5: NUM4.1@121.92,111.76 121.92,101.85 123.19,100.58 U16.9@123.19,100.33
NetNUM4_2: NUM4.2 U16.10 | length 12
  Bottom Layer w0.5: NUM4.2@124.46,111.76 124.46,101.85 125.73,100.58 U16.10@125.73,100.33
NetNUM4_3: NUM4.3 NUM4.8 RA13.2 RB13.2 | length 25.4
  Bottom Layer w1: RB13.2@116.84,116.84 RA13.2@119.38,116.84 127,116.84 ; NUM4.3@127,111.76 127,116.84 ; NUM4.8@127,127 127,116.84
NetNUM4_4: NUM4.4 U16.11 | length 13
  Bottom Layer w0.5: U16.11@128.27,100.33 128.27,102.87 127,104.14 127,109.22 NUM4.4@129.54,111.76
NetNUM4_6: NUM4.6 U16.12 | length 31.8
  Bottom Layer w0.5: U16.12@130.81,100.33 130.81,103.124 129.54,104.394 129.54,108.966 130.556,109.982 133.096,109.982 134.62,111.506 134.62,124.46 NUM4.6@132.08,127
NetNUM4_7: NUM4.7 U16.13 | length 34.6
  Bottom Layer w0.5: NUM4.7@129.54,127 131.064,128.524 133.096,128.524 135.89,125.73 135.89,110.744 134.62,109.474 134.62,101.85 133.35,100.58 U16.13@133.35,100.33
NetNUM4_9: NUM4.9 U16.15 | length 42
  Bottom Layer w0.5: NUM4.9@124.46,127 127,129.54 134.62,129.54 137.16,127 137.16,101.85 138.43,100.58 U16.15@138.43,100.33
NetNUM4_10: NUM4.10 U16.14 | length 53.8
  Bottom Layer w0.5: NUM4.10@121.92,127 125.73,130.81 135.89,130.81 139.7,127 139.7,99.06 139.13,98.49 137.48,98.49 135.89,100.08 U16.14@135.89,100.33
NetNUM5_1: NUM5.1 U12.9 | length 12
  Bottom Layer w0.5: NUM5.1@157.48,111.76 157.48,101.85 158.75,100.58 U12.9@158.75,100.33
NetNUM5_2: NUM5.2 U12.10 | length 12
  Bottom Layer w0.5: NUM5.2@160.02,111.76 160.02,101.85 161.29,100.58 U12.10@161.29,100.33
NetNUM5_3: NUM5.3 NUM5.8 RA14.2 RB14.2 | length 25.4
  Bottom Layer w1: RB14.2@152.4,116.84 RA14.2@154.94,116.84 162.56,116.84 ; NUM5.3@162.56,111.76 162.56,116.84 ; NUM5.8@162.56,127 162.56,116.84
NetNUM5_4: NUM5.4 U12.11 | length 13
  Bottom Layer w0.5: U12.11@163.83,100.33 163.83,102.87 162.56,104.14 162.56,109.22 NUM5.4@165.1,111.76
NetNUM5_6: NUM5.6 U12.12 | length 31.8
  Bottom Layer w0.5: U12.12@166.37,100.33 166.37,103.124 165.1,104.394 165.1,108.966 166.116,109.982 168.656,109.982 170.18,111.506 170.18,124.46 NUM5.6@167.64,127
NetNUM5_7: NUM5.7 U12.13 | length 34.6
  Bottom Layer w0.5: NUM5.7@165.1,127 166.624,128.524 168.656,128.524 171.45,125.73 171.45,110.744 170.18,109.474 170.18,101.85 168.91,100.58 U12.13@168.91,100.33
NetNUM5_9: NUM5.9 U12.15 | length 42
  Bottom Layer w0.5: NUM5.9@160.02,127 162.56,129.54 170.18,129.54 172.72,127 172.72,101.85 173.99,100.58 U12.15@173.99,100.33
NetNUM5_10: NUM5.10 U12.14 | length 53.8
  Bottom Layer w0.5: NUM5.10@157.48,127 161.29,130.81 171.45,130.81 175.26,127 175.26,99.06 174.69,98.49 173.04,98.49 171.45,100.08 U12.14@171.45,100.33
NetNUM6_1: NUM6.1 U10.9 | length 12
  Bottom Layer w0.5: NUM6.1@193.04,111.76 193.04,101.85 194.31,100.58 U10.9@194.31,100.33
NetNUM6_2: NUM6.2 U10.10 | length 12
  Bottom Layer w0.5: NUM6.2@195.58,111.76 195.58,101.85 196.85,100.58 U10.10@196.85,100.33
NetNUM6_3: NUM6.3 NUM6.8 RA15.2 RB15.2 | length 25.4
  Bottom Layer w1: RB15.2@187.96,116.84 RA15.2@190.5,116.84 198.12,116.84 ; NUM6.3@198.12,111.76 198.12,116.84 ; NUM6.8@198.12,127 198.12,116.84